# Altium PCB PIN_Gamma_PCB_July5.PcbDoc
Units mm, origin at the board's own origin, x right, y up, seen from the top; angles counter-clockwise.
Board outline 59.56 x 59.69 mm, 4 copper layers (L1 (Top), Layer 2, Layer 3, L4 (Bottom)), stack 0.778 mm thick; 70 components, 44 nets, 201 pads, 80 vias.
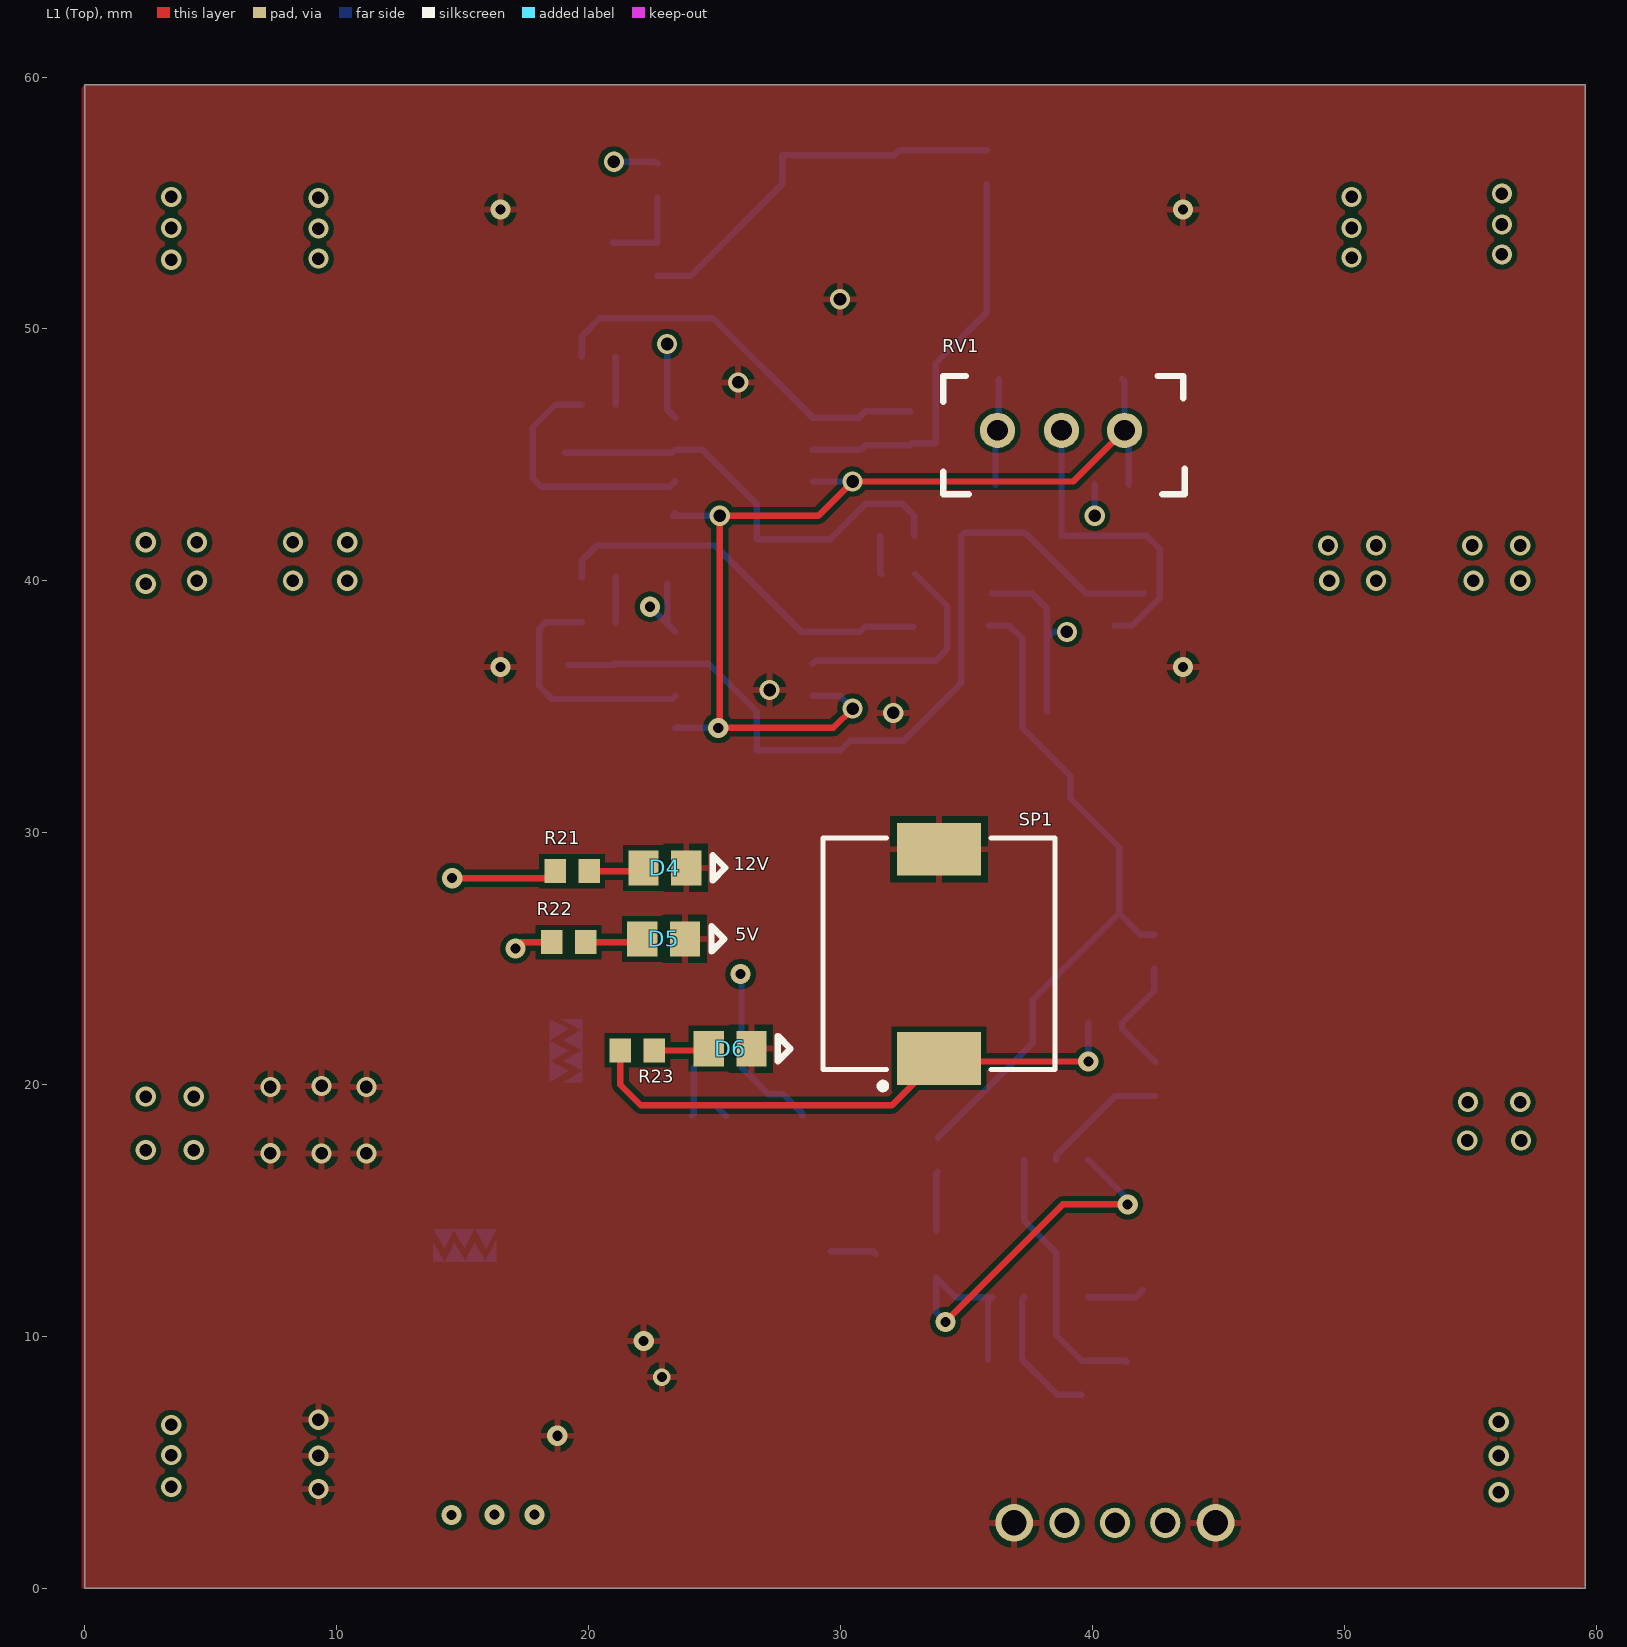
[diagram p0: L1 (Top) view]
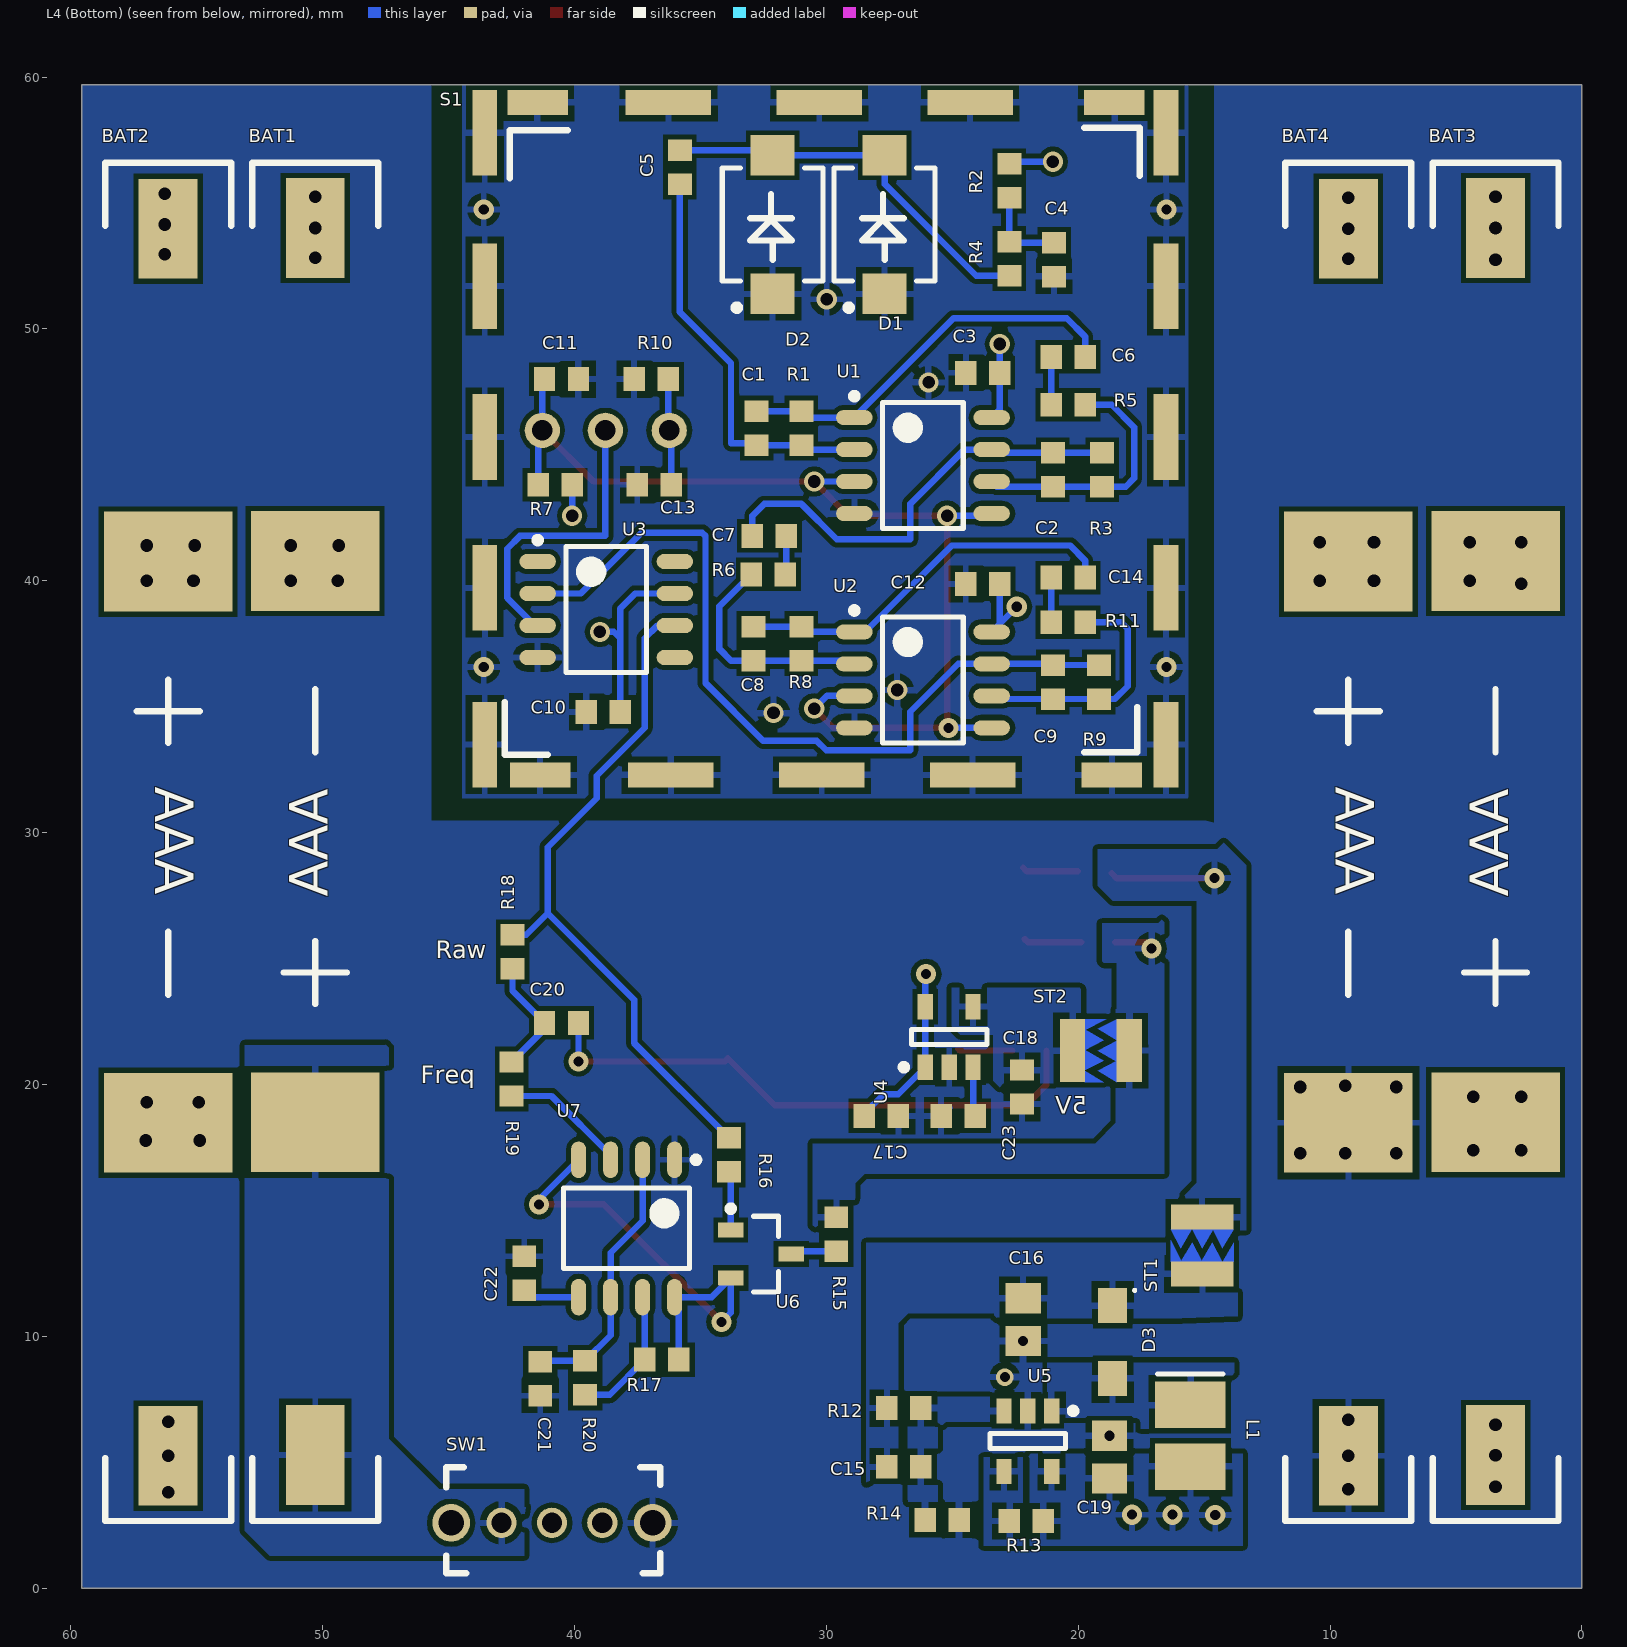
[diagram p1: L4 (Bottom) view, seen from below]
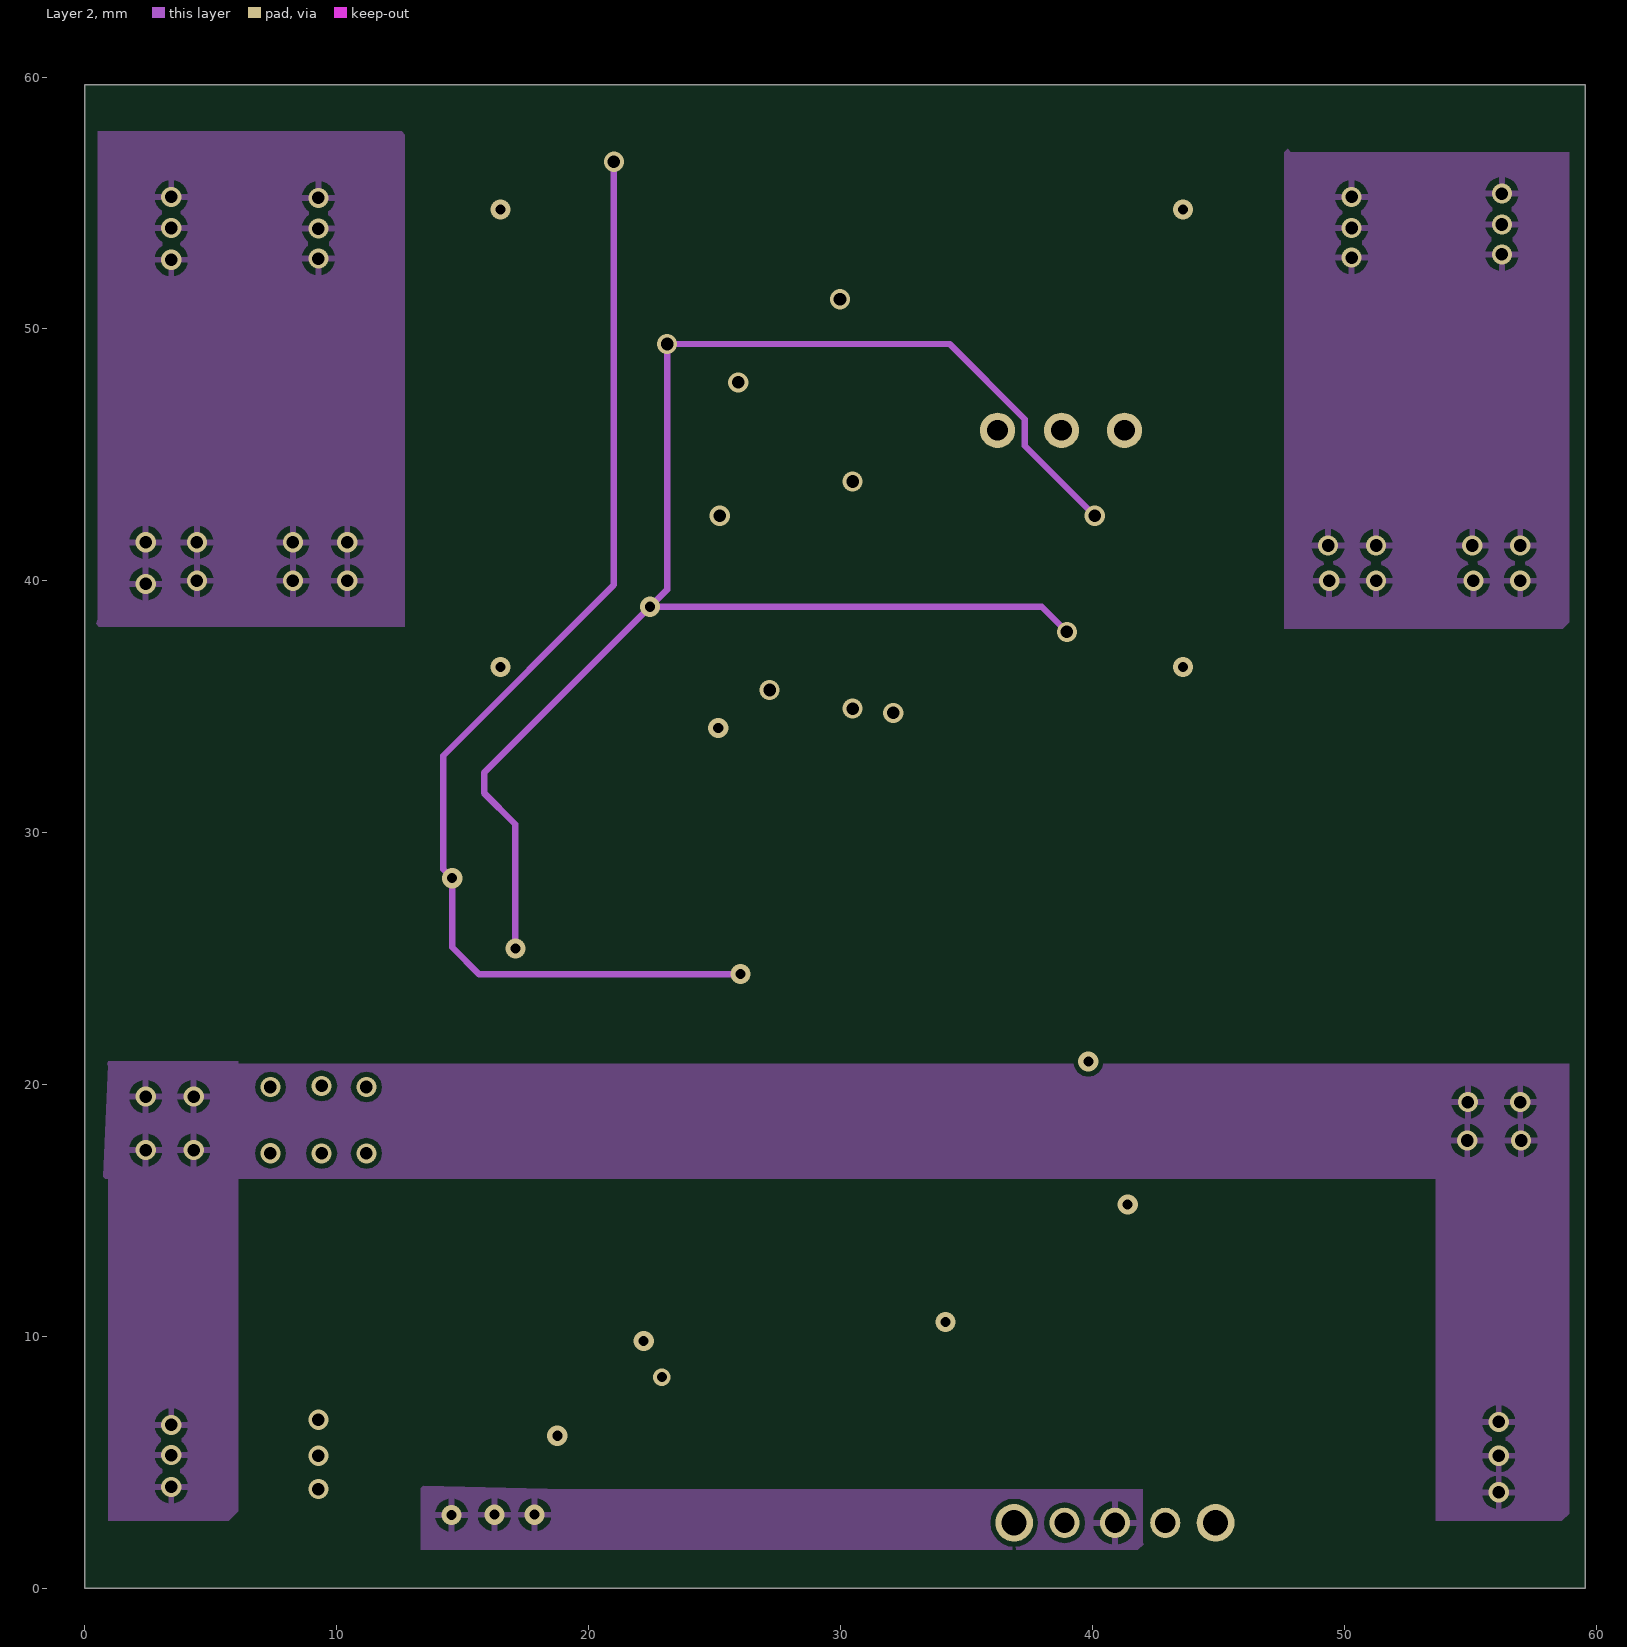
[diagram p2: Layer 2]
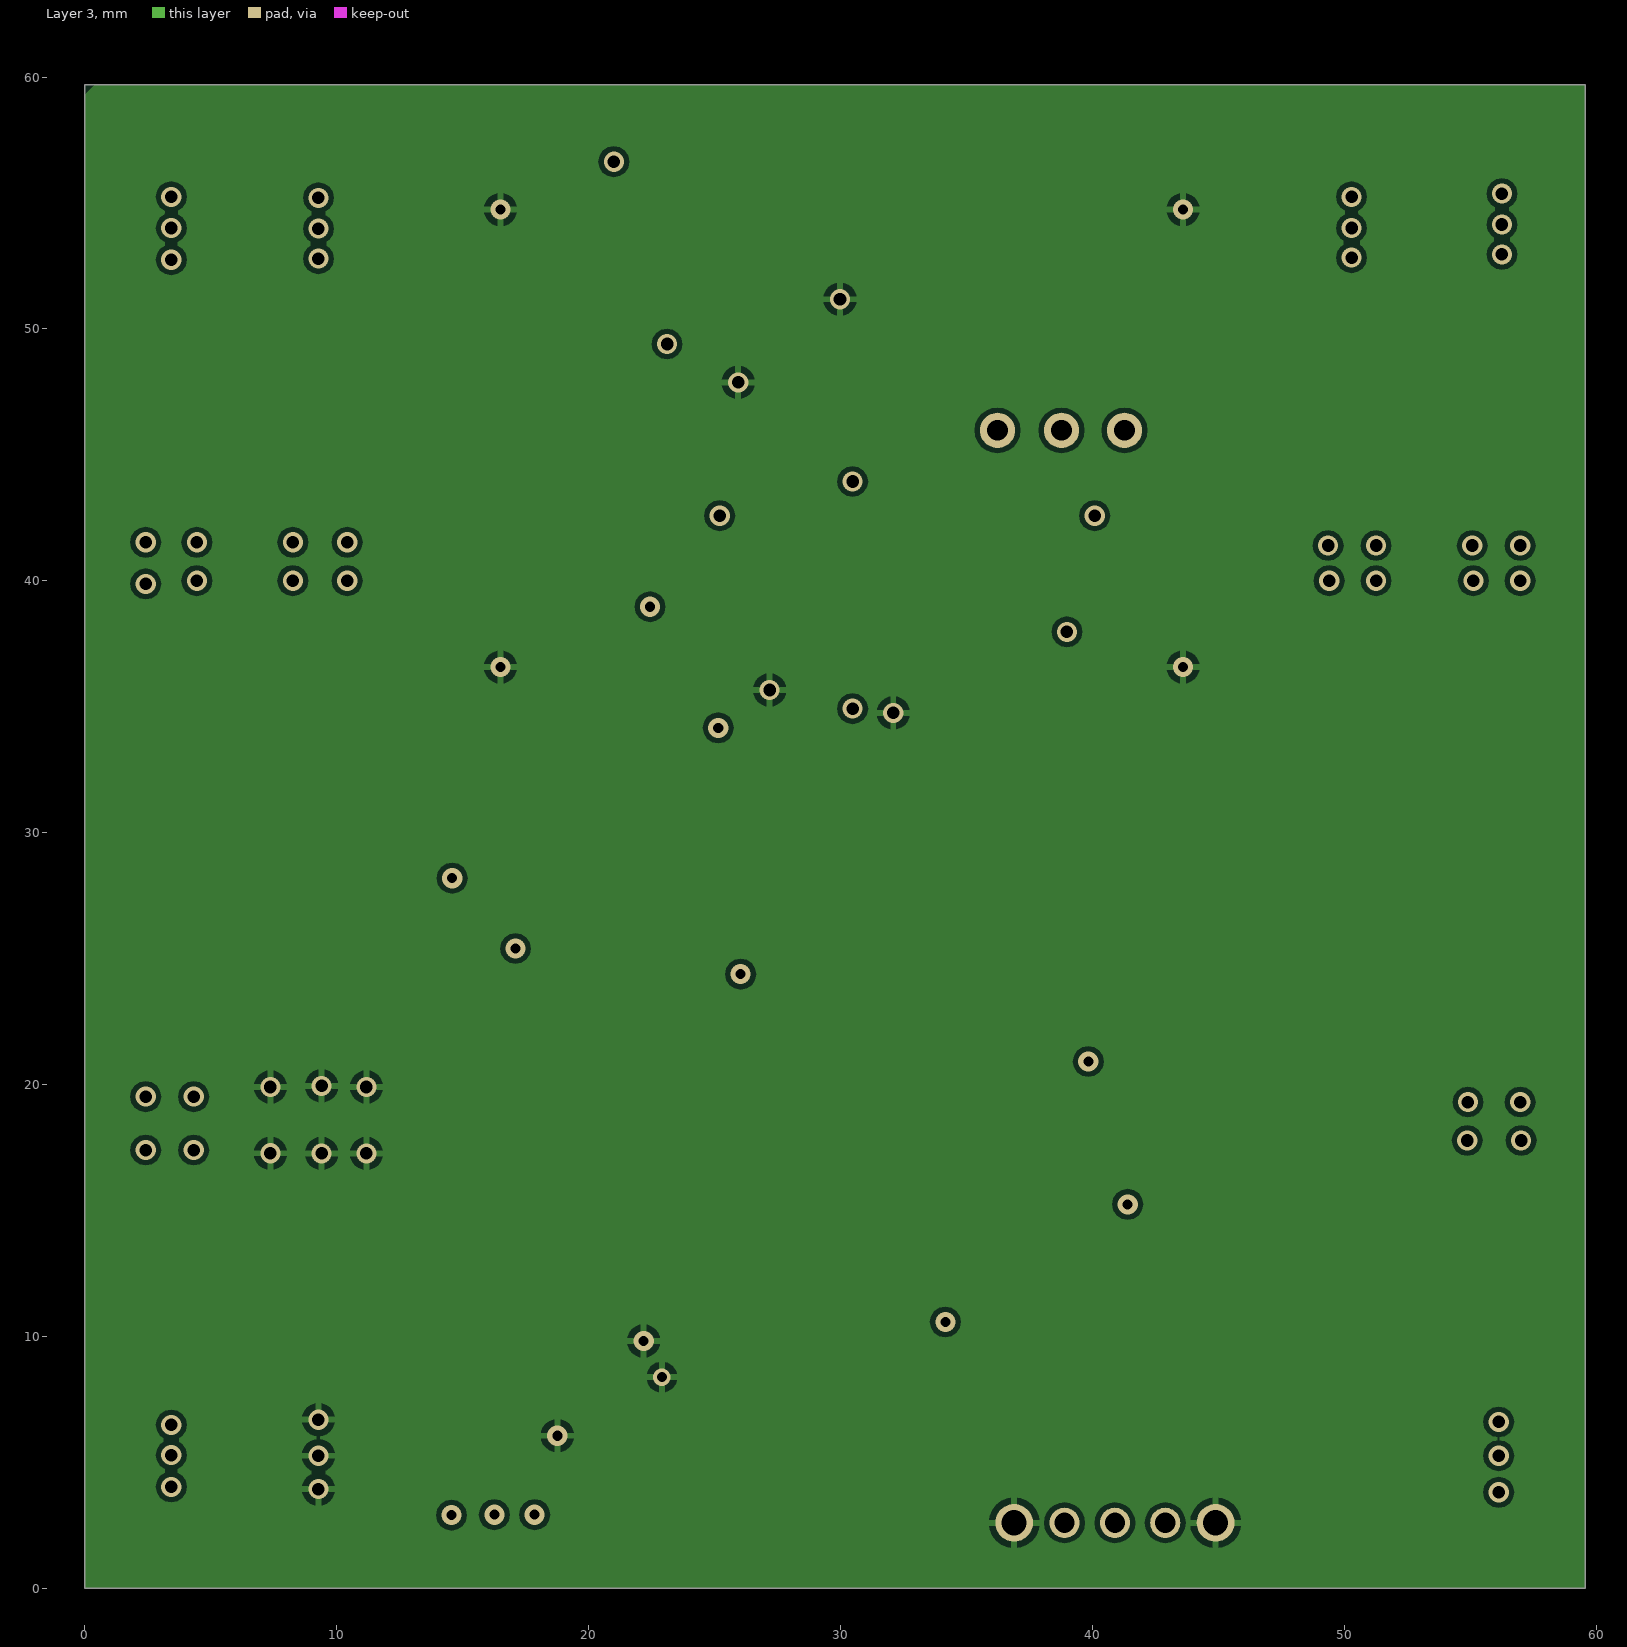
[diagram p3: Layer 3]

## Layer stack, top to bottom
Top Solder: solder mask 0.0102, Solder Resist, Dk 3.5
L1 (Top): signal copper 0.0356
Dielectric 1: core 0.254, FR-4, Dk 4.2
Layer 2: signal copper 0.036
Dielectric 3: prepreg 0.127, Dk 4.2
Layer 3: signal copper 0.036
Dielectric 2: core 0.254, Dk 4.2
L4 (Bottom): signal copper 0.0356
Bottom Solder: solder mask 0.0102, Solder Resist, Dk 3.5

## Board outline
0,0 59.563,0 59.563,59.69 0,59.69

## Design rules (kind name [scope] priority, off if disabled: settings)
Clearance [All vs InNetClass('All Nets')] p1: gap=0.2 ignorepadtopadclearanceinfootprint=FALSE
PolygonConnect [All] p1: connectstyle=Relief reliefconductorwidth=0.254 reliefentries=4 polygonreliefangle="90 Angle" airgapwidth=0.254
RoutingVias [All] p1: holewidth=0.4 width=0.8 viastyle="Through Hole" minholewidth=0.4 minwidth=0.8 maxholewidth=0.4 maxwidth=0.8
SolderMaskExpansion [All] p1: expansion=0.102
Width [All] p1: maxlimit=0.6 minlimit=0.254 preferedwidth=0.4 toplayer_maxwidth=0.254 toplayer_prefwidth=0.254 midlayer1_maxwidth=0.254 midlayer1_prefwidth=0.254 midlayer2_maxwidth=0.254 midlayer2_prefwidth=0.254 minimp=50.000000 maximp=50.000000 favimp=50.000000
30 further rules are at their usual default settings.

## Classes and differential pairs
component class PIN_Gamma: C1 C2 C3 C4 C5 C6 C7 C8 C9 C10 C11 C12 C13 C14 D1 D2 R1 R2 R3 R4 R5 R6 R7 R8 R9 R10 R11 RV1 U1 U2 U3
component class PIN_Gamma_Power: BAT1 BAT2 BAT3 BAT4 C15 C16 C17 C18 C19 C20 C21 C22 C23 D3 D4 D5 D6 L1 R12 R13 R14 R15 R16 R17 R18 R19 R20 R21 R22 R23 S1 SP1 ST1 ST2 SW1 U4 U5 U6 U7

## Components (designator, comment, footprint, x,y, rotation, side; value= is the part's Value field where it differs from the comment)
BAT1 "BAT/AAA_Clips/SMT" AAA_BATTERY_SMT 47.792,57.198 r0 bottom
BAT2 "BAT/AAA_Clips/SMT" AAA_BATTERY_SMT 58.634,2.073 r180 bottom
BAT3 "BAT/AAA_Clips/SMT" AAA_BATTERY_SMT 0.929,57.198 r0 bottom
BAT4 "BAT/AAA_Clips/SMT" AAA_BATTERY_SMT 11.771,2.073 r180 bottom
C1 "C/4P7/0603" C/0603 32.766,46.061 r90 bottom
C2 "C/4P7/0603" C/0603 21.001,44.41 r90 bottom
C3 "C/0.1U/0603" C/0603 23.789,48.26 r0 bottom
C4 "C/0.1U/0603" C/0603 20.955,52.752 r270 bottom
C5 "C/0.01U/0603" C/0603 35.814,56.428 r270 bottom
C6 "C/1000P/0603" C/0603 20.401,48.895 r0 bottom
C7 "C/0.01U/0603" C/0603 32.258,41.783 r180 bottom
C8 "C/4P7/0603" C/0603 32.893,37.505 r90 bottom
C9 "C/4P7/0603" C/0603 21.001,35.981 r90 bottom
C10 "C/0.1U/0603" C/0603 38.862,34.798 r0 bottom
C11 "C/0.1U/0603" C/0603 40.513,48.006 r180 bottom
C12 "C/0.1U/0603" C/0603 23.789,39.878 r0 bottom
C13 "C/0.1U/0603" C/0603 36.83,43.815 r0 bottom
C14 "C/0.01U/0603" C/0603 20.401,40.132 r0 bottom
C15 "C/330P/0805" C/0603 26.924,4.826 r0 bottom
C16 "C/4U7/0805" R/0805 22.185,10.668 r270 bottom
C17 "C/1U/0603" C/0603 27.813,18.759 r180 bottom
C18 "C/1U/0603" C/0603 22.225,19.902 r270 bottom
C19 "C/4U7/0805" R/0805 18.756,5.207 r90 bottom
C20 "C/100P/0603" C/0603 40.513,22.449 r180 bottom
C21 "C/0.012U/0603" C/0603 41.358,8.319 r270 bottom
C22 "C/0.1U/0603" C/0603 41.993,12.509 r90 bottom
C23 "C/0.1U/0603" C/0603 24.765,18.759 r0 bottom
D1 "D/VBPW34S" VBPW34S 27.686,54.146 r90 bottom locked
D2 "D/VBPW34S" VBPW34S 32.131,54.146 r90 bottom
D3 "D/MBR1020VL" SOD-123F 18.629,9.779 r270 bottom
D4 "D/LEDG/0805" D/0805 23.027,28.602 r180 top locked
D5 "D/LEDG/0805" D/0805 22.978,25.781 r180 top locked
D6 "D/LEDR/0805" D/0805 25.615,21.426 r180 top locked
L1 "L/10uH/SMD" INDP3030X15N 15.542,6.057 r270 bottom
R1 "R/10M/0603" R/0603 30.988,46.061 r90 bottom
R2 "R/1M/0603" R/0603 22.733,55.88 r270 bottom
R3 "R/10K/0603" R/0603 19.05,44.41 r90 bottom
R4 "R/10M/0603" R/0603 22.733,52.792 r270 bottom
R5 "R/1K/0603" R/0603 20.401,46.99 r180 bottom
R6 "R/1K/0603" R/0603 32.298,40.259 r0 bottom
R7 "R/100K/0603" R/0603 40.767,43.815 r0 bottom
R8 "R/10K/0603" R/0603 30.988,37.505 r90 bottom
R9 "R/10K/0603" R/0603 19.177,35.981 r90 bottom
R10 "R/150K/0603" R/0603 36.957,48.006 r0 bottom
R11 "R/1K/0603" R/0603 20.401,38.354 r180 bottom
R12 "R/118K/0603" R/0603 26.924,7.151 r180 bottom
R13 "R/976K/0603" R/0603 22.058,2.667 r0 bottom
R14 "R/13K7/0603" R/0603 25.4,2.706 r180 bottom
R15 "R/0r/0603" R/0603 29.605,14.063 r270 bottom
R16 "R/1K/0603" R/0603 33.865,17.209 r270 bottom
R17 "R/10K/0603" R/0603 36.532,9.08 r0 bottom
R18 "R/0r/0603" R/0603 42.458,25.273 r270 bottom
R19 "R/0r/0603" R/0603 42.498,20.219 r90 bottom
R20 "R/10K/0603" R/0603 39.58,8.358 r90 bottom
R21 "R/1K/0603" R/0603 19.343,28.475 r0 top
R22 "R/287r/0603" R/0603 19.207,25.654 r0 top
R23 "R/287r/0603" R/0603 21.931,21.353 r0 top
RV1 "RV/10K/25Turn" 10K/25TN 41.275,45.974 r180 top
S1 "RF Shield" "RF SHIELD" 44.061,59.49 r180 bottom locked
SP1 "SP/Piezo" "AUDIO PIEZO" 33.909,25.192 r90 top
ST1 "Shark Tooth" SHARKTOOTH 13.723,11.971 r90 bottom
ST2 "Shark Tooth" SHARKTOOTH 20.739,19.999 r180 bottom
SW1 "SW/SPDT/THT" SW/SPDT/THT 40.894,2.6 r0 bottom
U1 "U/MAX4477ASA+-ND" SO8 26.162,44.577 r180 bottom
U2 "U/MAX4477ASA+-ND" SO8 26.162,36.068 r180 bottom
U3 "U/MAX987ESA+-ND" SO8 38.735,38.862 r180 bottom
U4 "U/AP1150ADS50" SOT23-5 25.12,21.888 r90 bottom
U5 "LMR62014" SOT23-5 22.001,5.842 r270 bottom
U6 "U/2N3904/SOT23" SOT23-3 32.595,13.271 r180 bottom
U7 "U/LM555CMX" SO8 37.929,14.287 r270 bottom

## Footprints (in the part's own frame and the unit in brackets; to place one, negate y for a bottom-side part, rotate by r counter-clockwise, add the part's x,y. Pads: shape width x height; smd on the part's side, far side on the other; paste and mask are expansions set on the pad)
10K/25TN [mm]
  round 1.4 hole 0.82: 1(0,0) 2(2.5,0) 3(5.04,0)
  silkscreen extent -2.39,-2.16 7.2,2.54
AAA_BATTERY_SMT [mm] "AAA Battery Holder"
  rect 2.34x3.96 smd: 1(2.5,51.91) 4(2.5,3.19)
  rect 5.1x3.96 smd: 2(2.5,38.69) 3(2.5,16.41)
  silkscreen extent 0,0.6 5,54.52
"AUDIO PIEZO" [mm] "Piezo Speaker 2-Leads, Body 9.00x9.00mm, IPC Medium Density, Digikey 490-9647-1-ND"
  rect 2.1x3.35 smd: 1(-4.15,0) 2(4.15,0)
  silkscreen extent -5.37,-4.6 4.6,4.6, body extent -4.6,-4.5 4.6,4.5, height 2
C/0603 [mm] "Chip Capacitor, 2-Leads, Body 1.60x0.80mm, IPC Medium Density"
  rect 0.85x0.95 smd: 1(-0.675,0) 2(0.675,0)
  body extent -0.85,-0.45 0.85,0.45, height 0.9
D/0805 [mm] "LED, 2-Leads, Body 2.00x1.25mm, IPC Medium Density"
  rect 1.2x1.4 smd: 1(-0.85,0) 2(0.85,0)
  silkscreen extent -2.4,-0.5 -1.9,0.5, body extent -1.05,-0.67 1.05,0.67, height 1.35
INDP3030X15N [mm] "Precision Wire Wound Inductor, 2-Leads, Body 3.00x3.00mm, IPC Medium Density"
  rect 1.85x2.8 smd: 1(-1.225,0) 2(1.225,0)
  silkscreen extent -2.45,-1.3 -2.45,1.3, body extent -1.6,-1.5 1.6,1.5, height 1.6
R/0603 [mm] "Chip Resistor, 2-Leads, Body 1.60x0.80mm, IPC Medium Density"
  rect 0.85x0.95 smd: 1(-0.675,0) 2(0.675,0)
  body extent -0.85,-0.45 0.85,0.45, height 0.9
R/0805 [mm] "Chip Resistor 2-Leads, Body 2.00x1.25mm, IPC Medium Density"
  rect 1.2x1.4 smd: 1(-0.85,0) 2(0.85,0)
  body extent -1.05,-0.67 1.05,0.67, height 1.35
"RF SHIELD" [mm] "1.034X1.034X0.2-NON-VENTED"
  rect 0.99x3.4 smd: 1(0.5,-1.705) 2(0.5,-7.79) 3(0.5,-13.78) 4(0.5,-19.77) 5(0.5,-25.995) 11(27.55,-25.995) 12(27.55,-19.77) 13(27.55,-13.78) 14(27.55,-7.79) 15(27.55,-1.705)
  rect 2.4x0.99 smd: 6(2.7,-27.2) 10(25.4,-27.2) 16(25.5,-0.5) 20(2.6,-0.5)
  rect 3.4x0.99 smd: 7(7.89,-27.2) 8(13.88,-27.2) 9(19.87,-27.2) 17(19.77,-0.5) 18(13.78,-0.5) 19(7.79,-0.5)
  silkscreen extent 1.3,-26.4 26.5,-1.5, body extent -0.13,-27.85 28.2,0.08, height 5.6
SHARKTOOTH [mm] "Sharks Tooth"
  rect 1x2.5 smd: 1(0.51,1.35) 2(2.77,1.35)
  L1 (Top) region: 1.525,2.21 2.275,1.769 2.275,2.601
  L1 (Top) region: 1.525,1.35 2.275,0.909 2.275,1.741
  L1 (Top) region: 1.525,0.55 2.275,0.1 2.275,0.941
  L1 (Top) region: 1.75,0.1 1,0.541 1,0.1
  L1 (Top) region: 1.75,0.95 1,1.391 1,0.559
  L1 (Top) region: 1.75,1.75 1,2.2 1,1.359
  L1 (Top) region: 1.846,2.6 1,2.6 1,2.159
  body extent -0.1,0 3.4,2.7, height 0.1
SO8 [mm] "SOIC, 8-Leads, Body 4.90x3.90mm, Pitch 1.27mm, IPC Medium Density"
  oval 1.45x0.6 smd: 1(-2.725,1.905) 2(-2.725,0.635) 3(-2.725,-0.635) 4(-2.725,-1.905) 5(2.725,-1.905) 6(2.725,-0.635) 7(2.725,0.635) 8(2.725,1.905)
  silkscreen extent -2.85,-2.5 1.6,2.88, body extent -3,-2.5 3,2.5, height 1.75
SOD-123F [mm] "SODFL, 2-Leads, Body 1.72x3.60mm, IPC Medium Density"
  rect 1.4x1.15 smd: 1(-1.45,0) 2(1.45,0)
  silkscreen extent -2.1,0.82 -2,0.92, body extent -1.8,-0.97 1.8,0.97, height 1.08
SOT23-3 [mm] "SOT23, 3-Leads, Body 2.90x2.45mm, Pitch 0.95mm, IPC Medium Density"
  rect 1x0.6 smd: 1(-1.2,0.95) 2(-1.2,-0.95) 3(1.2,0)
  silkscreen extent -1.33,-1.5 0.7,1.92, body extent -1.3,-1.5 1.3,1.5, height 1.1
SOT23-5 [mm] "SOT23, 5-Leads, Body 2.90x2.45mm, Pitch 0.95mm, IPC Medium Density"
  rect 1x0.6 smd: 1(-1.2,0.95) 2(-1.2,0) 3(-1.2,-0.95) 4(1.2,-0.95) 5(1.2,0.95)
  silkscreen extent -1.32,-1.5 0.3,1.93, body extent -1.3,-1.5 1.3,1.5, height 1.1
SW/SPDT/THT [mm] "SWITCH SLIDE SPDT 200MA 30V"
  round 1.5 hole 1 unplated: 1(-4,0) 5(4,0)
  round 1.2 hole 0.8: 2(-2,0) 3(0,0) 4(2,0)
  silkscreen extent -4.3,-2.2 4.2,2
VBPW34S [mm] "SODFL, 2-Leads, Body 3.90x6.40mm, IPC Medium Density"
  rect 1.6x1.75 smd: A(-2.75,0) K(2.75,0)
  silkscreen extent -3.42,-2 2.25,2, body extent -3.2,-2 3.2,2, height 1.2

## Part data
BAT1 BAT2 BAT3 BAT4: "AAA 1.5V SMT Clips", Digikey Part=36-55-ND
C1 C2 C8 C9: "CAP CER 4.7PF 50V C0G/NPO 0603", Digikey=311-1740-1-ND
C3 C4 C10 C11 C12 C13 C22 C23: "CAP CER 0.1UF 50V X7R 0603", Digikey Part=399-7845-1-ND
C5 C7 C14: "CAP CER 0.01UF 50V X7R 0603", Digikey Part=399-1091-1-ND
C6: "CAP CER 1000PF 50V C0G/NP0 0603", Digikey=1276-1091-1-ND
C15: "CAP CER 330PF 50V C0G/NP0 0805", Digikey=1276-2645-1-ND
C16 C19: "CAP CER 4.7UF 50V X5R 0805"
  C16: Digikey=1276-1860-1-ND
  C19: Cost=0.22, Digikey Part=1276-2087-1-ND
C17 C18: "CAP CER 1UF 50V X5R 0603", Digikey=1276-1860-1-ND
C20: "CAP CER 100PF 50V C0G/NP0 0603", Digikey=399-1061-1-ND
C21: "CAP CER 0.012UF 50V X7R 0603", Digikey Part=1276-1785-1-ND
D1 D2: "PHOTODIODE PIN HI SPEED HI SENS"
D3: "Diode Schottky 20V 1A Surface Mount SOD-123F", Digikey Part=MBR1020VLCT-ND
D4 D5: "LED GREEN CLEAR 2.1V 0805 SMD", Digikey Part=160-1423-1-ND
D6: "LED GREEN CLEAR 2V 0805 SMD", Digikey Part=160-1427-1-ND
L1: "10µH Semi-Shielded Wirewound Inductor 1A 276 mOhm Max Nonstandard", Digikey Part=SRN3015-100MCT-ND
R1 R4: "RES SMD 10M OHM 5% 1/10W 0603", Digikey Part=RMCF0603JT10M0CT-ND
R2: "RES SMD 1M OHM 0.1% 1/16W 0603", Digikey Part=A119955CT-ND
R3 R8 R9 R17 R20: "RES SMD 10K OHM 5% 1/10W 0603", Digikey Part=311-10KGRCT-ND
R5 R6 R11 R16 R21: "RES SMD 1K OHM 5% 1/10W 0603", Digikey Part=311-1.0KGRCT-ND
R7: "RES SMD 100K OHM 1% 1/10W 0603", Digikey Part=311-100KHRCT-ND
R10: "RES SMD 150K OHM 1% 1/10W 0603", Digikey Part=311-150KGRDKR-ND
R12: "RES SMD 118K OHM 1% 1/10W 0603", Digikey Part=311-118KHRCT-ND
R13: "RES SMD 976K OHM 1% 1/10W 0603", Digikey Part=311-976KHRCT-ND
R14: "RES SMD 13.7K OHM 1% 1/10W 0603", Digikey Part=311-13.7KHRCT-ND
R15 R18 R19: "RES SMD 0 OHM JUMPER 1/10W 0603", Digikey Part=311-0.0GRCT-ND
R22 R23: "RES SMD 287 OHM 1% 1/10W 0603", Digikey Part=311-287HRCT-ND
RV1: "TRIMMER 10K OHM 0.5W TH", Digikey Part=A105870-ND
S1: "SMS-403C & SMS-403F RF Shield Cover 1.058\" (26.87mm) X 1.058\" (26.87mm) Non-Vented Surface Mount", Digikey PartC=1798-1210-ND, Digikey PartF=1798-1211-1-ND
SP1: "AUDIO PIEZO TRANSDUCER Max 12.5V 4KHZ SMD", Digikey Part=490-9647-1-ND
ST1 ST2: "Sharks Tooth Small"
SW1: "SWITCH SLIDE SPDT 200MA 30V", Digikey Part=A107673-ND
U1 U2: "Dual Low-Noise, Low-Distortion, Wide-Band, Rail-to-Rail Op Amps"
U3: "Comparator General Purpose CMOS, Push-Pull, Rail-to-Rail, TTL 8-SO"
U4: "IC REG LINEAR 5V 200MA SOT23-5", Digikey Part=AP1150ADS50CT-ND
U5: library part U/LMR62014XMF/NOPBCT-ND, "Boost Switching Regulator IC Positive Adjustable 3V 1 Output 1.8A (Switch) SC-74A, SOT-753"
U6: "TRANS NPN 40V 0.2A SOT23", Digikey Part=MMBT3904LT3GOSCT-ND
U7: "555 Type, Timer/Oscillator (Single) IC 8-SOIC"

## Via types
v1: diameter 0.8, hole 0.5, L1 (Top) to L4 (Bottom), 62 vias
v2: diameter 0.8, hole 0.4, L1 (Top) to L4 (Bottom), 17 vias
v3: diameter 0.7, hole 0.4, L1 (Top) to L4 (Bottom), 1 vias

## Nets (pads, with @x,y where several pads share a name; then routed paths per layer and width w, separated by ;. In a path a pad name is that pad's centre, name@x,y a point inside that pad or via, vN(x,y) a via of type N, cw(c..) or ccw(c..) an arc to the next point about the centre after c; other vN are vias at no path point)
5V: C3.1 C10.1 C12.1 R7.1 R15.1 R22.1 ST2.2 U1.8 U2.8 U3.7 | length 81.2
  L1 (Top) w0.254: v2(17.092,25.4) 17.346,25.654 R22.1
  Layer 2 w0.254: v2(17.092,25.4) 17.092,30.332 15.848,31.576 15.848,32.38 v2(22.439,38.971) ; v1(38.989,37.973) 37.991,38.971 v2(22.439,38.971) ; v1(40.092,42.585) 37.316,45.361 37.316,46.422 34.335,49.403 v1(23.114,49.403) 23.114,39.646 v2(22.439,38.971)
  L4 (Bottom) w0.254: v2(22.439,38.971) 23.114,38.296 ; C12.1 23.114,38.296 ; v1(23.114,49.403) C3.1 23.114,46.805 U1.8 ; U2.8 23.114,38.296 ; U3.7 37.592,39.497 38.187,38.902 38.187,37.719 ; C10.1 38.187,37.719 ; v1(38.989,37.973) 38.441,37.973 38.187,37.719 ; v1(40.092,42.585) R7.1
12V: C17.1 R2.1 R21.1 ST1.2 U4.1 U4.5 | length 59
  L1 (Top) w0.254: v2(14.583,28.194) 18.476,28.194 R21.1@18.668,28.386
  Layer 2 w0.254: v1(21.001,56.642) 21.001,39.837 14.223,33.059 14.223,28.553 v2(14.583,28.194) 14.583,25.446 15.645,24.384 v2(26.035,24.384)
  L4 (Bottom) w0.254: v1(21.001,56.642) 22.646,56.642 R2.1 ; v2(26.035,24.384) 26.07,24.349 U4.5 U4.1 27.143,19.615 27.721,19.615 28.488,18.848 C17.1
Beep: C20.2 R23.1 SP1.1 | length 22.6
  L1 (Top) w0.254: R23.1@21.256,21.353 21.256,19.991 22.07,19.177 32.044,19.177 SP1.1 34.036,20.915 v2(39.838,20.915)
  L4 (Bottom) w0.254: v2(39.838,20.915) C20.2
CompOut: R16.1 R18.1 U3.6 | length 27.7
  L4 (Bottom) w0.254: R16.1 37.632,21.65 37.632,23.368 41.061,26.797 ; U3.6@35.892,38.227 U3.6 36.703,38.227 37.211,37.719 37.211,34.163 39.116,32.258 39.116,31.369 41.061,29.424 41.061,26.797 ; R18.1 41.91,25.948 41.061,26.797
GND: BAT4.3 BAT4.4 C3.2 C4.2 C10.2 C11.2 C12.2 C13.2 C16.2 C17.2 C18.2 C19.2 C21.2 C22.2 C23.2 D1.A D2.A D4.1 D5.1 D6.1 R10.2 R14.2 S1.1 S1.2 S1.3 S1.4 S1.5 S1.6 S1.7 S1.8 S1.9 S1.10 S1.11 S1.12 S1.13 S1.14 S1.15 S1.16 S1.17 S1.18 S1.19 S1.20 SP1.2 SW1.1 SW1.5 U1.4 U2.4 U3.4 U4.2 U5.2 U7.1 | length 0.5
  L4 (Bottom) w0.254: C23.2@25.12,19.079 C23.2
  other v1: 9.271,3.937 9.271,5.263 9.271,6.694 7.366,17.272 9.398,17.267 11.176,17.267 7.366,19.902 11.176,19.902 9.398,19.949 32.095,34.754 27.186,35.666 25.938,47.879 29.981,51.181
  other v2: 18.756,6.057 22.185,9.818 16.497,36.576 43.601,36.576 16.497,54.737 43.601,54.737
  other v3: 22.908,8.382
IN+: C11.1 R7.2 RV1.1 U1.3 U1.5 U2.3 U2.5 | length 42.9
  L1 (Top) w0.254: v1(30.48,34.925) 29.718,34.163 v2(25.146,34.163) 25.204,34.221 v1(25.204,42.585) 29.123,42.585 v1(30.48,43.942) 39.243,43.942 RV1.1
  L4 (Bottom) w0.254: U2.5 v2(25.146,34.163) ; U1.5 23.35,42.585 v1(25.204,42.585) ; U2.3 29.972,35.433 v1(30.48,34.925) ; U1.3 v1(30.48,43.942) ; C11.1 41.275,47.919 RV1.1 41.442,45.807 R7.2
NetBAT1_1: BAT1.1 BAT1.2 SW1.4
NetBAT1_3: BAT1.3 BAT1.4 BAT2.1 BAT2.2
  other v1: 49.403,40.005 51.264,40.005 55.126,40.005 56.987,40.005 49.359,41.402 51.264,41.402 55.082,41.402 56.987,41.402 50.292,52.832 56.261,52.959 50.292,54.008 56.261,54.146 50.292,55.245 56.261,55.372
NetBAT2_3: BAT2.3 BAT2.4 BAT3.1 BAT3.2
  other v1: 56.134,3.81 3.429,4.027 56.134,5.263 3.429,5.288 3.429,6.486 56.134,6.604 2.413,17.399 4.318,17.399 54.884,17.78 57.023,17.78 54.911,19.304 56.987,19.304 2.413,19.521 4.318,19.521
NetBAT3_3: BAT3.3 BAT3.4 BAT4.1 BAT4.2
  other v1: 2.413,39.878 4.445,40.005 8.255,40.005 10.414,40.005 2.413,41.529 4.445,41.529 8.255,41.529 10.414,41.529 3.429,52.749 9.271,52.792 9.271,53.983 3.429,54.008 9.271,55.205 3.429,55.245
NetC1_1: C1.1 C5.2 R1.1 U1.2 | length 16.1
  L4 (Bottom) w0.254: U1.2 30.814,45.212 30.988,45.386 32.766,45.386 32.846,45.466 33.782,45.466 33.782,48.641 35.814,50.673 C5.2
NetC1_2: C1.2 C6.1 R1.2 U1.1 | length 15.9
  L4 (Bottom) w0.254: C6.1 19.726,49.698 20.447,50.419 24.95,50.419 U1.1 30.734,46.482 R1.2 C1.2
NetC2_1: C2.1 R3.1 R5.2 U1.6 | length 10.2
  L4 (Bottom) w0.254: R5.2 18.669,46.99 17.78,46.101 17.78,44.069 18.114,43.735 19.05,43.735 21.001,43.735 23.23,43.735 U1.6
NetC2_2: C2.2 C7.1 R3.2 U1.7 | length 17.8
  L4 (Bottom) w0.254: R3.2 C2.2 23.31,45.085 U1.7 24.511,45.212 26.67,43.053 26.67,41.656 29.591,41.656 30.988,43.053 32.465,43.053 32.933,42.585 C7.1
NetC4_1: C4.1 R2.2 R4.1 | length 3.5
  L4 (Bottom) w0.254: C4.1 22.693,53.427 R4.1 R2.2
NetC5_1: C5.1 D1.K D2.K R4.2 | length 15.8
  L4 (Bottom) w0.254: R4.2@22.733,52.117 24.05,52.117 27.686,55.753 D1.K D2.K 32.338,57.103 C5.1@35.814,57.103
NetC6_2: C6.2 R5.1 | length 1.9
  L4 (Bottom) w0.254: R5.1 C6.2
NetC7_2: C7.2 R6.1 | length 1.5
  L4 (Bottom) w0.254: C7.2 31.583,40.299 R6.1
NetC8_2: C8.2 C14.1 R8.2 U2.1 | length 15.6
  L4 (Bottom) w0.254: C14.1 19.726,40.808 20.32,41.402 25.019,41.402 28.448,37.973 U2.1 30.781,37.973 30.988,38.18 C8.2@32.893,38.18
NetC9_1: C9.1 R9.1 R11.2 U2.6 | length 9.7
  L4 (Bottom) w0.254: R11.2 18.288,38.354 18.034,38.1 18.034,35.814 18.542,35.306 R9.1 C9.1 23.31,35.306 U2.6
NetC9_2: C9.2 R9.2 U2.7 U3.2 | length 33.2
  L4 (Bottom) w0.254: R9.2@19.177,36.656 21.001,36.656 21.048,36.703 U2.7 24.765,36.703 26.67,34.798 26.67,33.274 30.005,33.274 30.386,33.655 32.512,33.655 34.798,35.941 34.798,41.783 34.925,41.91 37.338,41.91 39.751,39.497 U3.2 U3.2@42.037,39.497
NetC13_1: C13.1 R10.1 RV1.3 | length 4.2
  L4 (Bottom) w0.254: C13.1 36.155,45.894 RV1.3 36.282,46.021 R10.1
NetC14_2: C14.2 R11.1 | length 1.8
  L4 (Bottom) w0.254: R11.1 C14.2
NetC15_1: C15.1 R12.2 R14.1 U5.3
NetC15_2: C15.2 C16.1 D3.1 R12.1 ST1.1
NetC18_1: C18.1 ST2.1 U4.4
NetC20_1: C20.1 R18.2 R19.2 | length 4.8
  L4 (Bottom) w0.254: R18.2 42.458,23.719 C20.1 41.188,22.204 R19.2
NetC21_1: C21.1 R20.2 U7.2 U7.6 | length 10.7
  L4 (Bottom) w0.254: U7.2 37.294,14.598 38.564,13.328 U7.6 38.564,10.05 R20.2 41.318,9.034 C21.1
NetC22_1: C22.1 U7.5 | length 2.3
  L4 (Bottom) w0.254: U7.5 41.721,11.562 C22.1
NetC23_1: C23.1 U4.3 | length 2
  L4 (Bottom) w0.254: C23.1 24.17,18.839 U4.3
NetD3_2: D3.2 L1.1 U5.1
NetD4_2: D4.2 R21.2 | length 2.2
  L1 (Top) w0.254: R21.2 22.05,28.475 D4.2
NetD5_2: D5.2 R22.2 | length 2.3
  L1 (Top) w0.254: R22.2 22.001,25.654 D5.2
NetD6_2: D6.2 R23.2 | length 2.2
  L1 (Top) w0.254: R23.2 24.692,21.353 D6.2
NetR13_2: R13.2 U5.4
NetR15_2: R15.2 U6.3 | length 1.8
  L4 (Bottom) w0.254: R15.2 31.279,13.388 U6.3
NetR16_2: R16.2 U6.1 | length 2.3
  L4 (Bottom) w0.254: U6.1 33.795,16.464 R16.2
NetR17_1: R17.1 U6.2 U7.4 U7.8 | length 18.6
  L1 (Top) w0.254: v2(34.163,10.573) 38.83,15.24 41.4,15.24 v2(41.402,15.242)
  L4 (Bottom) w0.254: v2(34.163,10.573) 33.795,10.941 U6.2 34.554,11.562 U7.8 35.857,11.396 R17.1 ; U7.4 41.402,15.445 v2(41.402,15.242)
NetR17_2: R17.2 R20.1 U7.7 | length 5.5
  L4 (Bottom) w0.254: U7.7 37.207,11.475 R17.2 38.604,7.683 R20.1
NetR19_1: R19.1 U7.3 | length 5.1
  L4 (Bottom) w0.254: U7.3 38.564,17.199 40.909,19.544 R19.1
NetRV1_2: RV1.2 U3.3 | length 12.5
  L4 (Bottom) w0.254: RV1.2 38.775,41.783 42.164,41.783 42.672,41.275 42.672,39.321 41.578,38.227 U3.3 U3.3@40.894,38.227
NetSW1_2: SW1.2
OUTB: C8.1 R6.2 R8.1 U2.2 | length 9.1
  L4 (Bottom) w0.254: U2.2 29.014,36.83 R8.1 C8.1 33.782,36.83 34.243,37.291 34.243,38.989 R6.2@32.973,40.259
V_Bat: C19.1 L1.2 R13.1 SW1.3 U5.5
  other v2: 14.557,2.905 16.256,2.921 17.856,2.921
pads on no net: U3.1 U3.5 U3.8

## Polygon pours and split planes (outlines as drawn)
GND on L4 (Bottom) "L4 (Bottom)-GND" (solid, pour order 78): 0,0 59.436,0 59.563,0.127 59.563,59.69 0,59.69
12V on L4 (Bottom) "L4 (Bottom)-12V" (solid, pour order 74): 16.668,14.246 16.645,14.224 13.335,14.224 13.335,28.703 14.223,29.591 14.477,29.337 19.222,29.337 19.222,27.897 18.63,27.305 15.291,27.305 15.291,16.094 16.637,14.748 16.637,14.287
5V on L4 (Bottom) "L4 (Bottom)-5V" (solid, remove dead copper, pour order 72): 16.586,21.628 16.586,26.454 16.674,26.543 16.813,26.404 19.05,26.404 19.05,24.904 18.977,24.831 18.464,24.831 18.464,22.841 18.464,21.274
5V on L4 (Bottom) "L4 (Bottom)-5V 1" (solid, pour order 68): 28.855,14.351 28.855,16.084 28.475,16.464 16.586,16.464 16.586,22.555 17.145,23.114 17.272,22.987 18.502,22.987 18.502,18.474 19.323,17.653 30.538,17.653 30.538,14.407 30.355,14.224 30.228,14.351
NetC15_1 on L4 (Bottom) "L4 (Bottom)-NetC15_1" (solid, pour order 62): 25.574,1.956 26.757,1.956 26.757,7.601 22.397,7.601 22.397,6.505 22.501,6.401 25.574,6.401
NetC15_2 on L4 (Bottom) "L4 (Bottom)-NetC15_2 1" (solid, pour order 60): 27.138,4.076 28.408,4.076 28.408,13.716 23.328,13.716 23.328,10.922 26.744,10.922 27.138,10.528
NetC15_2 on L4 (Bottom) "L4 (Bottom)-NetC15_2" (solid, pour order 58): 23.328,10.715 15.882,10.715 13.673,10.795 13.673,13.716 23.328,13.716 23.328,10.795
NetD3_2 on L4 (Bottom) "L4 (Bottom)-NetD3_2" (solid, pour order 56): 21.447,7.796 21.447,6.342 13.803,6.342 13.803,8.964 21.423,8.964 21.423,6.557
GND on L4 (Bottom) "L4 (Bottom)-GND 1" (solid, pour order 52): 24.217,5.588 24.217,1.697 25.279,1.697 25.279,6.296 25.174,6.401 22.501,6.401 22.517,7.88 23.328,7.88 23.328,10.414 21.423,10.414 21.423,6.557 17.727,6.557 17.727,5.588
NetR13_2 on L4 (Bottom) "L4 (Bottom)-NetR13_2 1" (solid, pour order 50): 22.207,5.195 22.207,3.848 22.207,1.697 23.751,1.697 23.751,5.195 23.247,5.195
V_Bat on L4 (Bottom) "L4 (Bottom)-V_Bat 1" (solid, pour order 48): 21.931,5.142 21.931,1.697 20.549,1.697 13.467,1.697 13.467,5.342 13.835,5.342 22.001,5.342
NetBAT1_1 on L4 (Bottom) "L4 (Bottom)-NetBAT1_1" (solid, pour order 34): 41.91,3.329 41.993,3.246 41.993,1.3 52.097,1.3 53.086,2.289 53.086,21.569 47.519,21.569 47.498,21.59 47.371,21.463 47.371,5.932 45.376,3.937 41.993,3.937 41.993,2.869
NetC18_1 on L4 (Bottom) "L4 (Bottom)-NetC18_1" (solid, pour order 12): 19.889,20.049 22.967,20.049 23.114,19.902 23.368,20.156 23.368,21.982 24.686,21.982 25.019,22.315 25.019,23.839 19.939,23.839 19.889,23.789
V_Bat on L4 (Bottom) "L4 (Bottom)-V_Bat" (none, pour order 46): 21.931,5.142
NetBAT1_3 on L4 (Bottom) "L4 (Bottom)-NetBAT1_3" (solid, pour order 18): 52.959,39.497
NetR13_2 on L4 (Bottom) "L4 (Bottom)-NetR13_2" (solid, pour order 10): 20.447,22.124
V_Bat on Layer 2 "Layer 2-V_Bat" (solid, pour order 44): 13.335,4.067 13.335,1.524 41.806,1.524 42.037,1.755 41.993,1.799 41.993,3.937 19.177,3.937
NetBAT2_3 on Layer 2 "Layer 2-NetBAT2_3" (solid, pour order 32): 0.933,20.924 1.029,20.828 58.928,20.828 58.928,15.875 58.801,15.748 58.293,16.256 0.714,16.256
NetBAT2_3 on Layer 2 "Layer 2-NetBAT2_3 1" (solid, pour order 30): 53.467,20.894 53.533,20.828 58.928,20.828 58.928,2.967 58.634,2.673 53.634,2.673 53.634,20.828
NetBAT2_3 on Layer 2 "Layer 2-NetBAT2_3 2" (solid, pour order 28): 0.635,21.082 0.793,20.924 6.096,20.924 6.096,3.054 5.715,2.673 0.929,2.673 0.929,20.748 0.635,21.042
NetBAT3_3 on Layer 2 "Layer 2-NetBAT3_3" (solid, pour order 26): 0.381,38.1 0.461,38.18 12.7,38.18 12.7,57.719 12.573,57.846 0.508,57.846 0.508,38.481
NetBAT1_3 on Layer 2 "Layer 2-NetBAT1_3" (solid, pour order 24): 47.879,57.023 58.928,57.023 58.928,38.354 58.674,38.1 47.625,38.1 47.625,57.023 47.752,57.15
GND on Layer 3 "Layer 3-GND" (solid, pour order 40): 59.563,59.69 59.563,0 0,0 0,59.309 0.381,59.69
GND on L1 (Top) "L1 (Top)-GND" (solid, pour order 42): 0,59.69 59.563,59.69 59.563,0.127 59.436,0 -0.127,0 -0.127,59.563

## Other copper
L4 (Bottom):
  pour cut-out: 29.972,1.917
  pour cut-out: 44.45,59.824 44.45,31.369 15.574,31.369 15.63,31.425 15.63,59.82 14.605,59.824 14.605,30.4 14.923,30.48 15.787,30.48 45.68,30.48 45.68,59.824

## Silkscreen, mask and mechanical layers (free items; w line width, h text height)
Top Overlay:
  text "12V" at 25.758,28.321 h0.9
  text "5V" at 25.816,25.527 h0.9
Bottom Overlay:
  text "Raw" at 45.505,25.019 h0.7
  text "Freq" at 46.101,20.058 h0.7
  text "5V" at 19.644,18.839 h0.7
  text "12V" at -5.969,10.668 h0.7
Mechanical 1:
  the board outline again, w0.254

## Text inside footprints (layer, text, board x,y; h text height)
BAT1: Bottom Overlay "AAA" at 49.792,27.448 h1.52 r270
BAT2: Bottom Overlay "AAA" at 56.634,31.823 h1.52 r90
BAT3: Bottom Overlay "AAA" at 2.929,27.448 h1.52 r270
BAT4: Bottom Overlay "AAA" at 9.771,31.823 h1.52 r90